# Altium PCB Accelerometer.PcbDoc
Units mil, origin at the board's own origin, x right, y up, seen from the top; angles counter-clockwise.
Board outline 1600 x 1275 mil, 2 copper layers (Top Layer, Bottom Layer); 15 components, 14 nets, 52 pads, 1 vias.
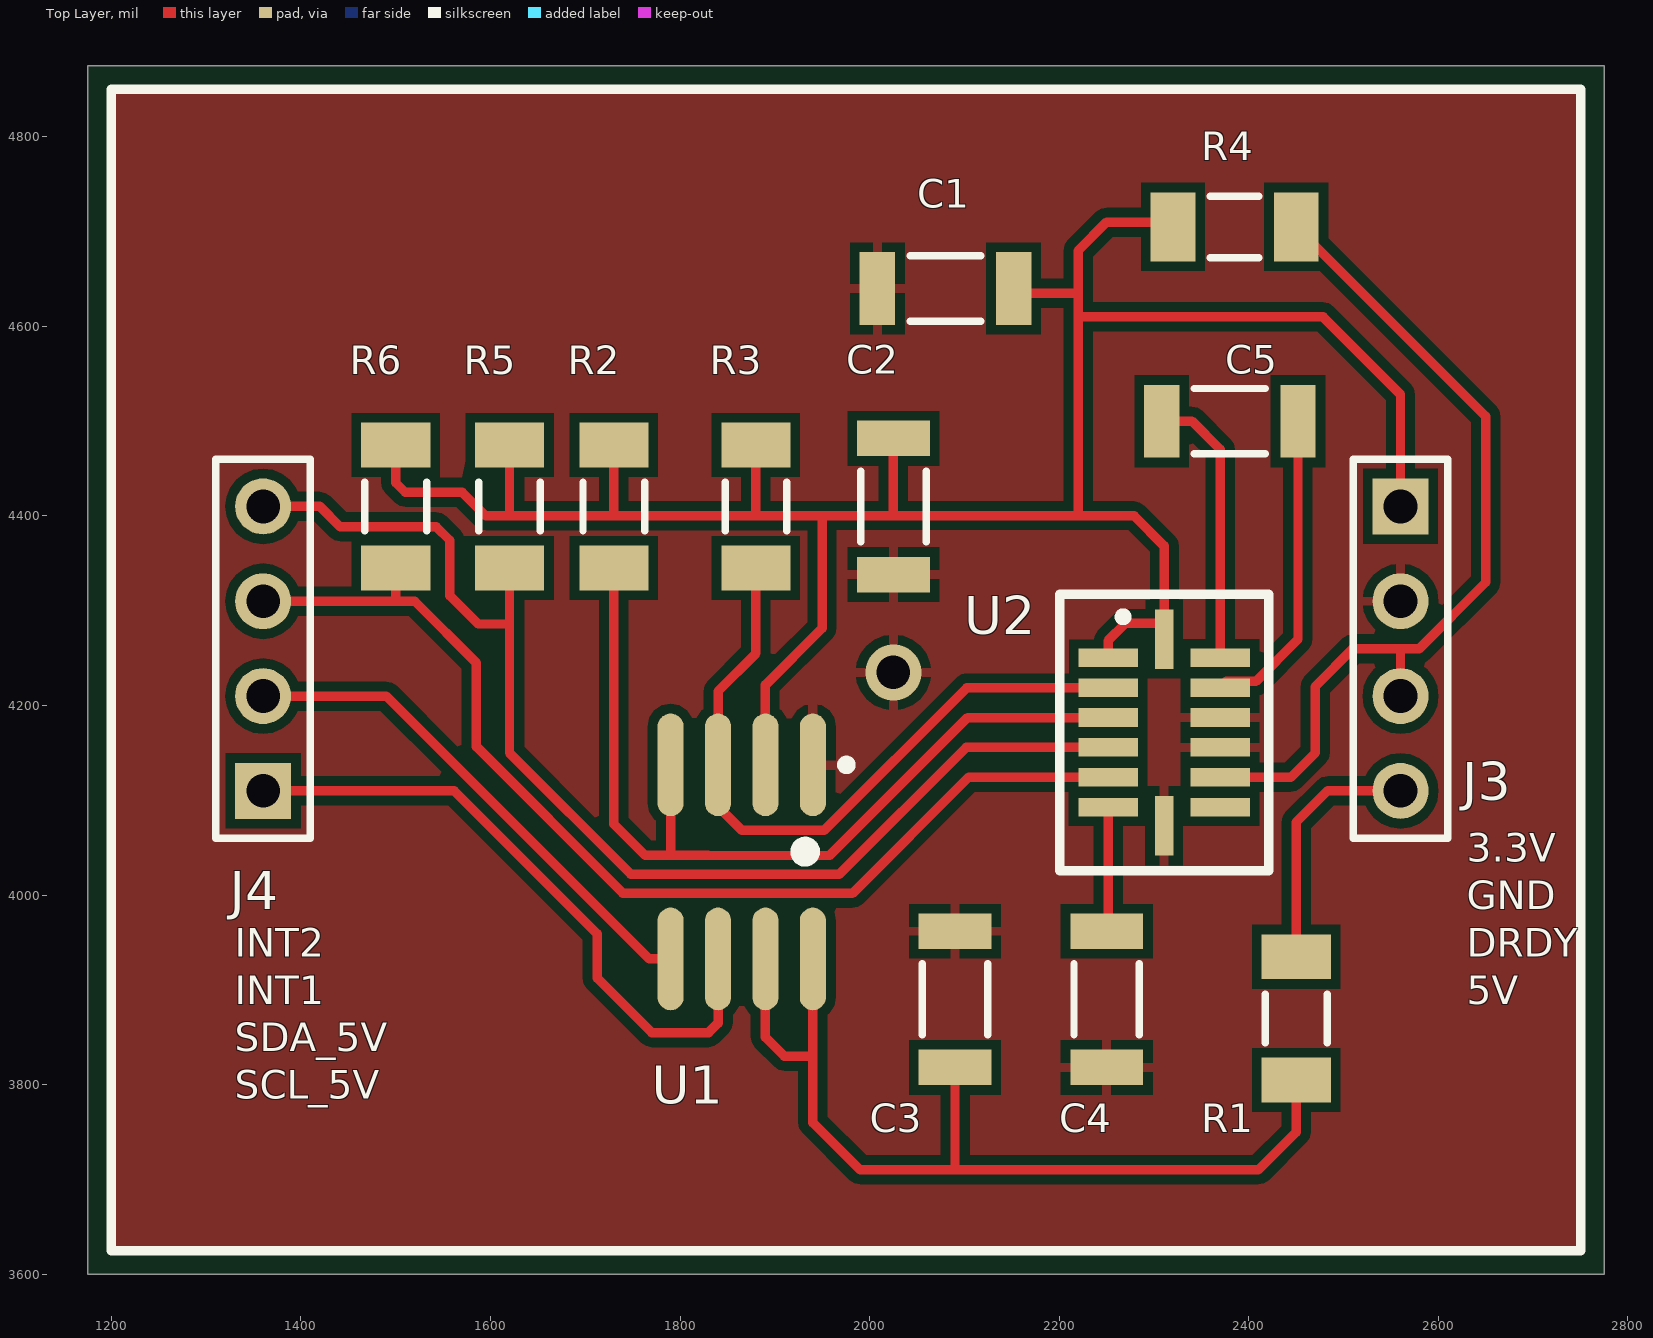
[diagram p0: Top Layer view]
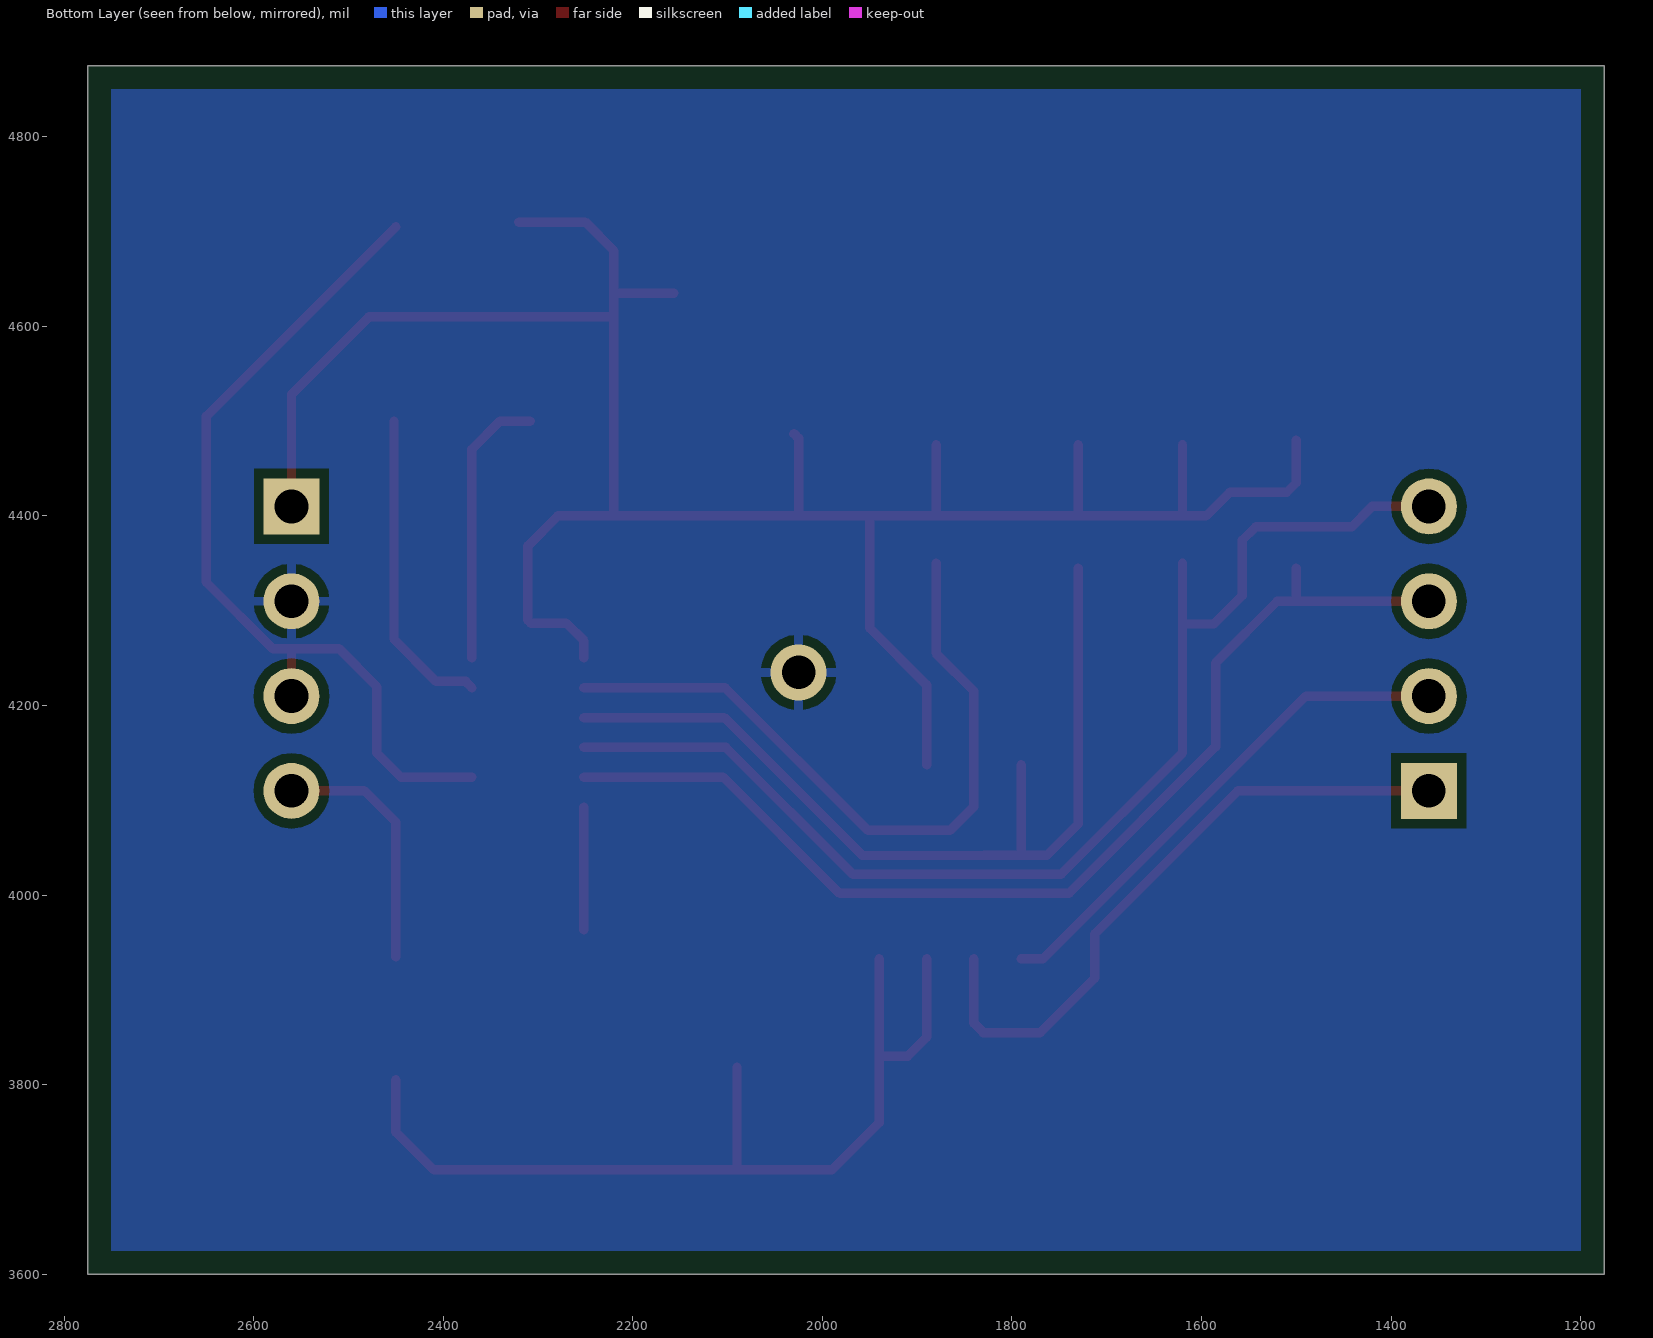
[diagram p1: Bottom Layer view, seen from below]

## Layer stack, top to bottom
Top Layer: signal copper 1.4
Dielectric: dielectric 12.6, FR-4, Dk 4.8
Bottom Layer: signal copper 1.4

## Board outline
1200,4875 2775,4875 2775,3600 1175,3600 1175,4875

## Design rules (kind name [scope] priority, off if disabled: settings)
Clearance [All] p1: gap=10
PolygonConnect [All] p1: connectstyle=Relief reliefconductorwidth=10 reliefentries=4 polygonreliefangle="90 Angle" airgapwidth=10
RoutingVias [All] p1: holewidth=28 width=50 viastyle="Through Hole" minholewidth=28 minwidth=50 maxholewidth=28 maxwidth=50
SolderMaskExpansion [All] p1: expansion=4
Width [All] p1: maxlimit=10 minlimit=10 preferedwidth=10
28 further rules are at their usual default settings.

## Components (designator, comment, footprint, x,y, rotation, side; value= is the part's Value field where it differs from the comment)
C1 "Cap" FTPNT_CAPS 2080,4640 r0 top
C2 "Cap" FTPNT_CAPS 2025,4410 r90 top
C3 "Cap" FTPNT_CAPS 2090,3890 r270 top
C4 "Cap" FTPNT_CAPS 2250,3890 r90 top
C5 "Cap" FTPNT_CAPS 2380,4500 r180 top
J3 "Header 4" HDR1X4 2560,4410 r270 top
J4 "Header 4" HDR1X4 1360,4110 r90 top
R1 "Res1" FTPNT_RESISTORS 2450,3870 r90 top
R2 "Res1" FTPNT_RESISTORS 1730,4410 r90 top
R3 "Res1" FTPNT_RESISTORS 1880,4410 r90 top
R4 "Res1" FTPNT_RESISTORS 2385,4705 r180 top
R5 "Res1" FTPNT_RESISTORS 1620,4410 r90 top
R6 "Res1" FTPNT_RESISTORS 1500,4410 r90 top
U1 "12C Translator" FTPNT_I2CTRANSLATOR 1865,4035 r270 top
U2 "Mag/Accel" FTPNT_MAG/ACC 2350,4270 r270 top

## Footprints (in the part's own frame and the unit in brackets; to place one, negate y for a bottom-side part, rotate by r counter-clockwise, add the part's x,y. Pads: shape width x height; smd on the part's side, far side on the other; paste and mask are expansions set on the pad)
FTPNT_CAPS [mm] "Chip Capacitor, 2-Leads, Body 3.20x1.60mm, IPC Low Density"
  rect 0.95x1.95 smd: 1(-1.825,0) 2(1.825,0)
  silkscreen extent -0.95,-0.87 0.95,0.87, body extent -1.7,-0.9 1.7,0.9, height 1.8
FTPNT_I2CTRANSLATOR [mm] "TSOP, 8-Leads, Body 4.90x3.90mm, Pitch 1.27mm, IPC Low Density"
  oval 2.75x0.7 smd: 1(-2.6,1.905) 2(-2.6,0.635) 3(-2.6,-0.635) 4(-2.6,-1.905) 5(2.6,-1.905) 6(2.6,-0.635) 7(2.6,0.635) 8(2.6,1.905)
  silkscreen extent -2.72,1.5 -0.08,2.93, body extent -2,-2.5 2,2.5, height 0.25
FTPNT_MAG/ACC [mm]
  rect 0.5x1.6 smd: 1(0.5,-2.5) 2(1.3,-2.5) 3(2.1,-2.5) 4(2.9,-2.5) 5(3.7,-2.5) 6(4.5,-2.5) 8(4.5,0.5) 9(3.7,0.5) 10(2.9,0.5) 11(2.1,0.5) 12(1.3,0.5) 13(0.5,0.5)
  rect 1.6x0.5 smd: 7(5,-1) 14(0,-1)
  silkscreen extent -1.2,-3.8 6.2,1.8
FTPNT_RESISTORS [mm] "Chip Resistor, 2-Leads, Body 3.10x1.60mm, IPC Low Density"
  rect 1.2x1.85 smd: 1(-1.65,0) 2(1.65,0)
  silkscreen extent -0.65,-0.82 0.65,0.82, body extent -1.6,-0.85 1.6,0.85, height 0.7
HDR1X4 [mm] "Connector; Header; 4 Position"
  rect 1.5x1.5 hole 0.9: 1(0,0)
  round 1.5 hole 0.9: 2(2.54,0) 3(5.08,0) 4(7.62,0)
  silkscreen extent -1.27,-1.27 8.89,1.27

## Part data
C1 C2 C3 C4 C5: "CAP CER 1UF 25V 10% X7R 1206"
J3 J4: "CONN HEADER 4POS .100 STR TIN"
R1 R2 R3 R4 R5 R6: "RES 300 OHM 1/4W 1% 1206 SMD"
U1: library part Translator, "IC LEVEL TRANSLATOR 8-SOIC"
U2: library part "Mag/Accel Header", "ACCELEROMETER/MAGNETOMETER LGA14"

## Via types
v1: diameter 59.06, hole 35.43, Top Layer to Bottom Layer, 1 vias

## Nets (pads, with @x,y where several pads share a name; then routed paths per layer and width w, separated by ;. In a path a pad name is that pad's centre, name@x,y a point inside that pad or via, vN(x,y) a via of type N, cw(c..) or ccw(c..) an arc to the next point about the centre after c; other vN are vias at no path point)
3.3V: C1.2 C2.2 J3.1 R2.2 R3.2 R4.2 R5.2 R6.2 U1.2 U2.1 U2.14 | length 2591.7
  Top Layer w10: R6.2@1500,4479.96 1500,4435 1510,4425 1570,4425 1595,4400 1620,4400 ; R5.2 1620,4400 ; R2.2 1730,4400 ; R3.2 1880,4400 ; U1.2 1890,4221.72 1950,4281.72 1950,4400 ; 2025,4405 C2.2 C2.2@2030,4486.85 ; C1.2@2156.85,4635 2220,4635 ; U2.1 2251.57,4268.43 2270,4286.85 2307.48,4286.85 2310.63,4290 2310.63,4368.43 2279.06,4400 2220,4400 ; R4.2@2320.04,4710 2250,4710 2220,4680 2220,4635 ; J3.1 2560,4528.28 2478.28,4610 2220,4610 ; 1620,4400 1730,4400 ; 1730,4400 1880,4400 ; 1880,4400 1950,4400 ; 1950,4400 2220,4400 ; 2220,4400 2220,4610 ; 2220,4610 2220,4635
5V: J3.4 R1.2 | length 265.7
  Top Layer w10: R1.2 2450,4077 2483,4110 J3.4
DRDY: J3.3 R4.1 U2.9 | length 914.4
  Top Layer w10: U2.9 2444.33,4124.33 2470,4150 2470,4220 2510,4260 2560,4260 ; R4.1 2650,4504.96 2650,4330 2580,4260 2560,4260 ; J3.3 2560,4260
GND: C1.1 C2.1 C3.1 C4.1 J3.2 U1.1 U2.7 U2.10 U2.11
  other v1: 2025,4235
INT1: J4.3 R6.1 U2.5 | length 1156.8
  Top Layer w10: J4.3 1500,4310 ; R6.1 1500,4310 ; U2.5 2104.33,4124.33 1981.77,4001.77 1813.38,4001.77 1747.49,4001.77 1747.26,4002 1739.72,4002 1585,4156.72 1585,4245 1520,4310 1500,4310
INT2: J4.4 R5.1 U2.4 | length 1305
  Top Layer w10: J4.4@1375,4395 J4.4 1420,4410 1441.34,4388.66 1542.63,4388.66 1557,4374.29 1557,4316 1587,4286 1620,4286 ; R5.1@1620,4350.04 1620,4286 ; 1748,4022 1620,4150 1620,4286 ; 1750,4022 1821.43,4022 1821.66,4021.77 1860.2,4021.77 1967.77,4021.77 2101.83,4155.83 U2.4
NetC3_2: C3.2 R1.1 U1.7 U1.8 | length 1024
  Top Layer w10: U1.7 1890,3850 1910,3830 1940,3830 ; U1.8 1940,3830 ; C3.2 2090,3710 ; R1.1 2450,3750 2410,3710 2090,3710 ; 1940,3830 1940,3760 1990,3710 2090,3710
NetC4_2: C4.2 U2.6 | length 129.4
  Top Layer w10: C4.2@2251.57,3963.43 U2.6
NetC5_1: C5.1 U2.12 | length 333.4
  Top Layer w10: U2.12 2376.34,4225.47 2407.39,4225.47 2451.85,4269.93 C5.1
NetC5_2: C5.2 U2.13 | length 293.8
  Top Layer w10: C5.2 2340,4500 2369.68,4470.31 U2.13
SCL: R3.1 U1.3 U2.2 | length 757.6
  Top Layer w10: R3.1@1880,4350.04 1880,4255 1840,4215 U1.3 1840,4093.39 1865.17,4068.23 1901.92,4068.23 1951.92,4068.23 2102.51,4218.82 U2.2
"SCL 5V": J4.1 U1.6 | length 684.7
  Top Layer w10: J4.1 1561.58,4110 1712.5,3959.08 1712.5,3912.5 1770,3855 1830,3855 1840,3865 U1.6
SDA: R2.1 U1.4 U2.3 | length 961
  Top Layer w10: R2.1 1730,4075 1763,4042 1790,4042 ; U1.4 1790,4042 ; U2.3 2103.32,4187.32 1957.77,4041.77 1829.94,4041.77 1829.72,4042 1790,4042
"SDA 5V": J4.2 U1.5 | length 544.9
  Top Layer w10: J4.2 1490,4210 1767.36,3932.64 U1.5
pads on no net: U2.8

## Polygon pours and split planes (outlines as drawn)
GND on Top Layer "GND" (solid, remove dead copper, pour order 4): 1200,4850 2750,4850 2750,3625 1225,3625 1200,3625 1200,4850
GND on Bottom Layer "GND" (solid, remove dead copper, pour order 6): 1200,4850 2750,4850 2750,3625 1200,3625 1200,4850

## Silkscreen, mask and mechanical layers (free items; w line width, h text height)
Top Overlay:
  lines w10: 1200,3625 1200,4850 2750,4850 2750,3625 1200,3625
  text "3.3V" at 2630,4035 h30
  text "GND" at 2630,3985 h30
  text "INT2" at 1330,3935 h30
  text "DRDY" at 2630,3935 h30
  text "INT1" at 1330,3885 h30
  text "5V" at 2630,3885 h30
  text "SDA_5V" at 1330,3835 h30
  text "SCL_5V" at 1330,3785 h30